# EAGLE board Jds-040-Usb-C (EAGLE 9.6.2)
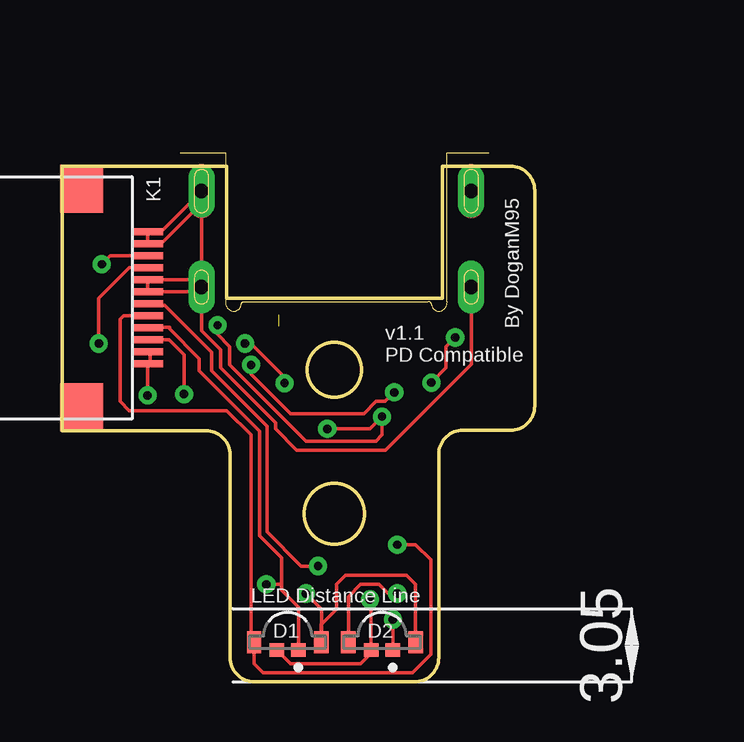
[diagram p0: board, top side]
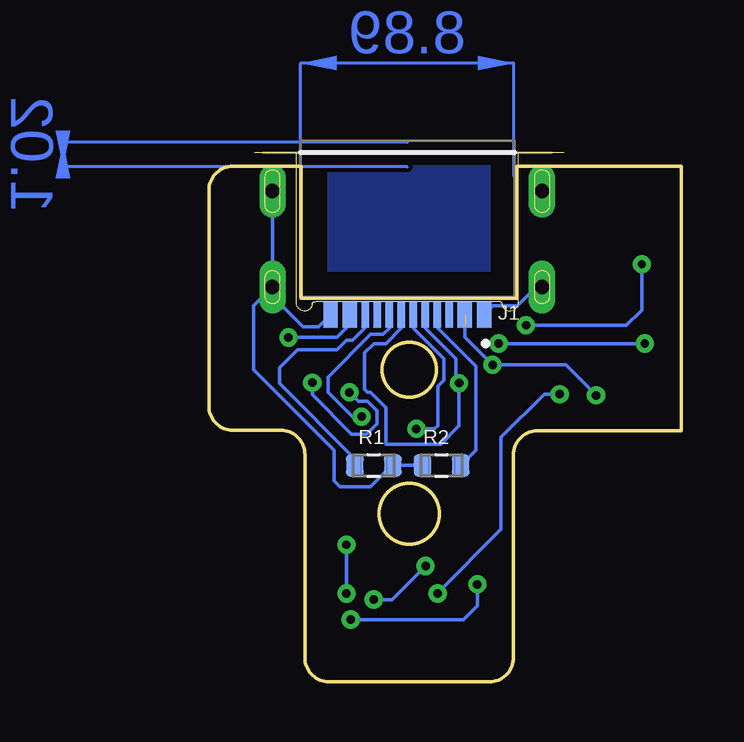
[diagram p1: board, bottom side, seen from below]

Size 19.7 x 21.48 mm. Coordinates in mm from the lower left corner, seen from the top.
Outline: 8,0 14.7,0 arc90 15.7,1 15.7,9.48 arc-90 16.7,10.48 18.7,10.48 arc90 19.7,11.48 19.7,20.48 arc90 18.7,21.48 15.85,21.48 15.85,15.98 6.85,15.98 6.85,21.48 0,21.48 0,10.46 6,10.46 arc-90 7,9.46 7,1 arc90 8,0
Outline: circle at 11.35,13 radius 1.12
Outline: circle at 11.35,7 radius 1.25
Copper layers (1*16): Top 0.035mm / dielectric 1.5mm / Bottom 0.035mm
Design rules "default *": minimum track width 6mil, minimum drill 0.35mm, track to track 6mil, track to pad 6mil, pad to pad 6mil, via to via 6mil, smd to smd 6mil, copper to edge 40mil, drill to drill 6mil, minimum pad ring 10mil, minimum via ring 8mil, stop-mask expansion 4mil, vias tented up to drill 20mil, thermal gap 10mil

## Footprints (pad centres in the part's own frame; a part is rotated, then mirrored left to right if it is on the bottom)
LED_IN-S126TASRGB = smd 0.6 x 0.55: 1 -0.45,0.325; 2 0.45,0.325 | smd 0.6 x 0.9: 3 -1.4,0; 4 1.4,0
GCT_USB4500-03-0-A_REVA = smd 0.6 x 1.1: A1_B12 -3.2,5.15; A4_B9 -2.4,5.15; B1_A12 3.2,5.15; B4_A9 2.4,5.15 | smd 0.3 x 1.1: A5 -1.25,5.15; A6 -0.25,5.15; A7 0.25,5.15; A8 1.25,5.15; B5 1.75,5.15; B6 0.75,5.15; B7 -0.75,5.15; B8 -1.75,5.15 | drill 0.6 pad 0.95 long: S1 -5.62,0; S4 5.62,0 | drill 0.6 pad 0.8 long: S2 5.62,4; S3 -5.62,4
687112149022 = smd 0.3 x 1.3: 1 -2.75,0; 2 -2.25,0; 3 -1.75,0; 4 -1.25,0; 5 -0.75,0; 6 -0.25,0; 7 0.25,0; 8 0.75,0; 9 1.25,0; 10 1.75,0; 11 2.25,0; 12 2.75,0 | smd 2 x 1.8: Z1 -4.55,-2.75; Z2 4.55,-2.75
RES_0603 = smd 0.74 x 0.93: 1 -0.795,0; 2 0.795,0

## Placement (x,y rotation side)
D1  IN-S126TASRGB  [LED_IN-S126TASRGB]  9.4,1.65 180 top
D2  IN-S126TASRGB  [LED_IN-S126TASRGB]  13.34,1.65 180 top
J1  USB4500-03-0-A_REVA  [GCT_USB4500-03-0-A_REVA]  11.43,20.44 180 bottom
K1  687112149022  [687112149022]  3.56,16 270 top
R1  5k1  [RES_0603]  12.83,9.01 0 bottom
R2  5k1  [RES_0603]  10,9.01 0 bottom

## Library data of the parts
D1 D2 = IN-S126TASRGB; AVAILABILITY: In Stock; CHECK_PRICES: https://www.snapeda.com/parts/IN-S126TASRGB/Inolux/view-part/?ref=eda; DESCRIPTION: Red, Green, Blue (RGB) - LED Indication - Discrete 1.6V Red, 2.8V Green, 2.8V Blue 4-SMD; MF: Inolux; MP: IN-S126TASRGB; PACKAGE: 1206 Inolux; PRICE: None; PURCHASE-URL: https://pricing.snapeda.com/search?q=IN-S126TASRGB&ref=eda; SNAPEDA_LINK: https://www.snapeda.com/parts/IN-S126TASRGB/Inolux/view-part/?ref=snap
J1 = USB4500-03-0-A_REVA; AVAILABILITY: In Stock; DESCRIPTION: USB-C (USB TYPE-C) USB 2.0 Receptacle Connector 24 (16+8 Dummy) Position Board Edge, Cutout; Surface Mount; Through Hole, Right Angle; MF: Global Connector Technology; MP: USB4500-03-0-A; PACKAGE: None; PRICE: None
K1 = FPC_Connectors_Flat_Flexible_Cable_rev15c
R1 R2 = Resistor_Capacitor; CREATED_BY: PCBLayout.com; DIGIKEY_PART_NUMBER: 311-0.0GRTR-ND; MANUFACTURER: Yageo; MPN: RC0603JR-070RL; PACKAGE: SMD 0603

## Nets
1,2_USB_5V: J1.A4_B9 J1.B4_A9 K1.11 K1.12
3_VCC: D1.3 D2.3 K1.10
4_B_3VG: D1.1 D2.1 K1.9
5_R_2V2G: D1.4 D2.4 K1.8
6_G_3V3G: D1.2 D2.2 K1.7
7,8,11,12_GND: J1.A1_B12 J1.B1_A12 J1.S1 J1.S2 J1.S3 J1.S4 K1.1 K1.2 K1.5 K1.6 R1.2 R2.1
9_D-: J1.A7 J1.B7 K1.4
10_D+: J1.A6 J1.B6 K1.3
N$1: J1.B5 R1.1
N$2: J1.A5 R2.2

## Tracks (layer width: path | path; a pad name or v marks a point on that pad's centre or on a via)
1,2_USB_5V  (via drill 0.35)  (1 unrouted)
  Top 0.152: K1.11 3.66,13.71 3.66,13.25 K1.12 v3.56,11.93 | v16.38,14.35 16,13.97 16,13.08 v15.39,12.46 | v13.84,12.06 13.46,11.68 13.08,11.68 12.57,11.17 9.53,11.17 7.87,12.82 v7.87,13.2
  Bottom 0.152: v3.56,11.93 4.83,13.2 v7.87,13.2 | v7.87,13.2 7.92,13.2 | 9.03,14.81 9.02,14.81 | v16.38,14.35 14.35,14.35 13.83,14.87 J1.B4_A9 | v15.39,12.46 15.39,11.96 13.75,10.32 13.14,10.32 12.7,10.76 12.7,11.3 13.08,11.68 13.46,11.68 v13.84,12.06 | J1.A4_B9 9.03,14.36 v7.87,13.2
3_VCC  (via drill 0.35)
  Top 0.152: K1.10 4.47,14.25 5.08,13.64 v5.08,11.98 | v10.16,3.68 10.82,3.02 10.82,1.67 D1.3 10.8,2.39 11.43,3.02 11.43,4.06 11.81,4.44 14.35,4.44 14.73,4.06 D2.3
  Bottom 0.152: v5.08,11.98 5.71,11.98 7.52,10.18 7.52,6.35 10.16,3.7 v10.16,3.68
4_B_3VG  (via drill 0.35)
  Top 0.152: K1.9 3.66,14.78 4.47,14.78 4.47,14.7 5.71,13.46 5.71,12.95 8.23,10.43 8.23,6.09 9.14,5.18 9.14,4.06 | 9.14,4.06 9.14,3.81 9.85,3.1 D1.1 | D2.1 v13.79,2.59 | v8.51,4.06 9.14,4.06
  Bottom 0.152: v13.79,2.59 9.09,2.59 8.51,3.17 v8.51,4.06
5_R_2V2G  (via drill 0.35)
  Top 0.152: K1.8 2.55,15.25 2.41,15.11 2.41,11.68 2.79,11.3 6.86,11.3 7.87,10.28 7.87,1.77 D1.4 8,0.76 8.38,0.38 14.61,0.38 15.37,1.14 15.37,5.08 14.73,5.71 v13.97,5.71 | v13.97,3.68 13.59,3.68 13.21,4.06 12.45,4.06 11.94,3.55 D2.4
  Bottom 0.152: v13.97,5.71 v13.97,3.68
6_G_3V3G  (via drill 0.35)
  Top 0.152: K1.7 3.66,15.69 4.27,15.69 6.22,13.74 6.22,12.95 8.53,10.64 8.53,6.24 9.96,4.82 v10.67,4.82 | D1.2 9.51,0.76 12.45,0.76 12.88,1.2 D2.2 12.88,3.37 v12.83,3.42
  Bottom 0.152: v10.67,4.82 12.06,3.42 v12.83,3.42
7,8,11,12_GND
  Top 0.152: 3.66,16.3 K1.6 | 3.66,18.28 K1.2 | 3.66,18.74 K1.1 | 3.66,16.76 K1.5 | J1.S2 17.07,16.3 17.07,13.23 13.49,9.65 9.78,9.65 8.89,10.54 8.89,10.79 6.6,13.08 6.6,13.84 5.81,14.63 J1.S3 | 5.81,19.93 J1.S1 4.12,18.75 K1.1 | 5.81,19.93 J1.S3 | K1.1 K1.2 | K1.5 K1.6 | K1.5 5.5,16.75 J1.S3 | K1.6 5.62,16.25 J1.S3 | K1.2 4.12,18.25 5.81,19.93
  Bottom 0.152: R2.1 R1.2 12.06,9.01 12.95,8.12 14.22,8.12 14.48,8.38 14.48,9.65 17.83,13 17.83,15.66 J1.S2 | J1.S2 17.42,16.07 | J1.S2 17.05,16.06 15.77,14.78 15.14,14.78 J1.B1_A12 | J1.S4 J1.S2 | J1.A1_B12 7.85,15.67 6.83,15.67 6.06,16.44 J1.S3
9_D-  (via drill 0.35)
  Top 0.152: K1.4 2.79,17.25 1.52,15.98 v1.52,14.09 | v7.62,14.09 7.87,14.09 9.27,12.7 v9.27,12.44
  Bottom 0.152: J1.B7 10.67,15.28 10.67,14.73 9.4,13.46 9.4,12.57 v9.27,12.44 9.27,10.66 10.03,9.9 12.32,9.9 12.32,11.43 12.95,12.06 13.08,12.06 13.21,12.19 13.21,13.71 12.83,14.09 12.32,14.09 11.68,14.73 J1.A7 | v7.62,14.09 v1.52,14.09
10_D+  (via drill 0.35)
  Top 0.152: K1.3 2,17.75 v1.65,17.39 | v6.48,14.85 6.48,14.47 6.99,13.97 6.99,13.2 10.16,10.03 13.08,10.03 13.34,10.28 v13.34,11.04 12.83,10.54 v11.05,10.54
  Bottom 0.152: v1.65,17.39 1.65,15.49 2.29,14.85 v6.48,14.85 | J1.B6 12.18,14.74 12.45,14.47 12.95,14.47 14.73,12.7 14.73,12.06 13.72,11.04 v13.34,11.04 | J1.A6 11.18,14.73 9.91,13.46 9.91,12.57 10.16,12.31 10.16,10.66 10.29,10.54 v11.05,10.54
CUTOUT_C
  pour Bottom: 6.99,21.46 15.88,21.46 15.88,16 6.99,16
N$1
  Bottom 0.152: J1.B5 13.21,15.26 13.21,14.73 13.72,14.22 13.97,14.22 14.35,13.84 16,13.84 16.76,13.08 16.76,12.44 13.62,9.3 R1.1
N$2
  Bottom 0.152: J1.A5 10.18,14.75 8.57,13.14 8.57,9.65 R2.2
(copper drawn outside any net)
  shapes: Bottom area x2

## Text on the board
tNames: By DoganM95 | v1.1 / PD Compatible | LED Distance Line